# EAGLE board kapacz_drecyciel (EAGLE 6.6.0)
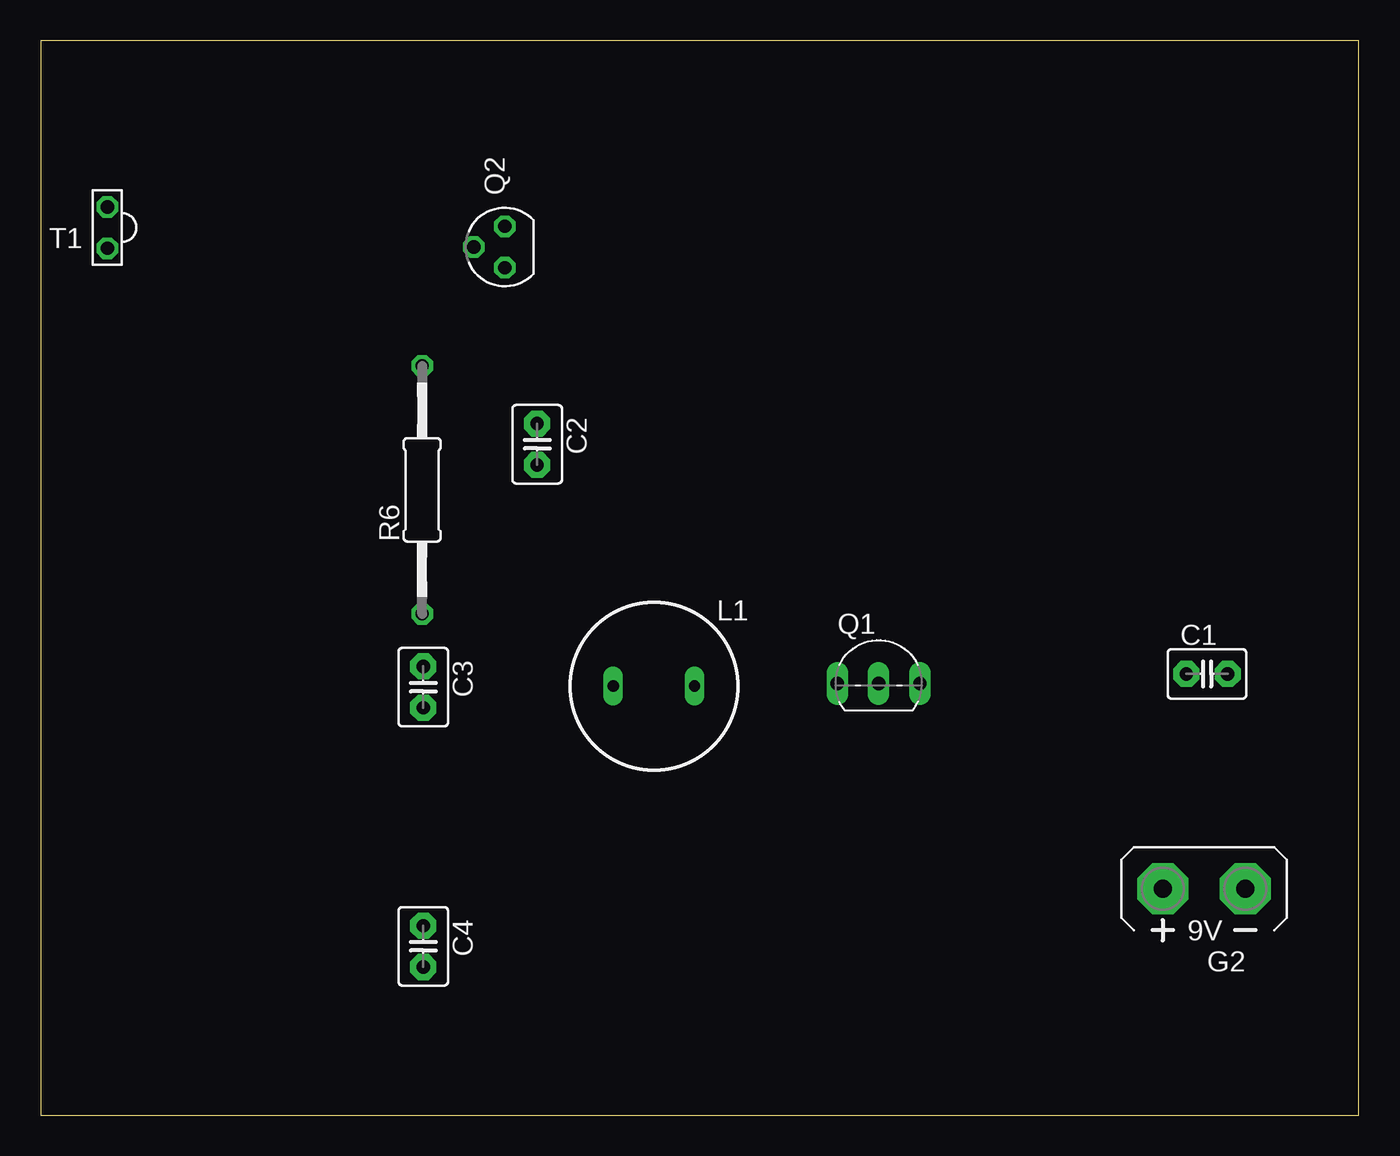
[diagram p0: board, top side]
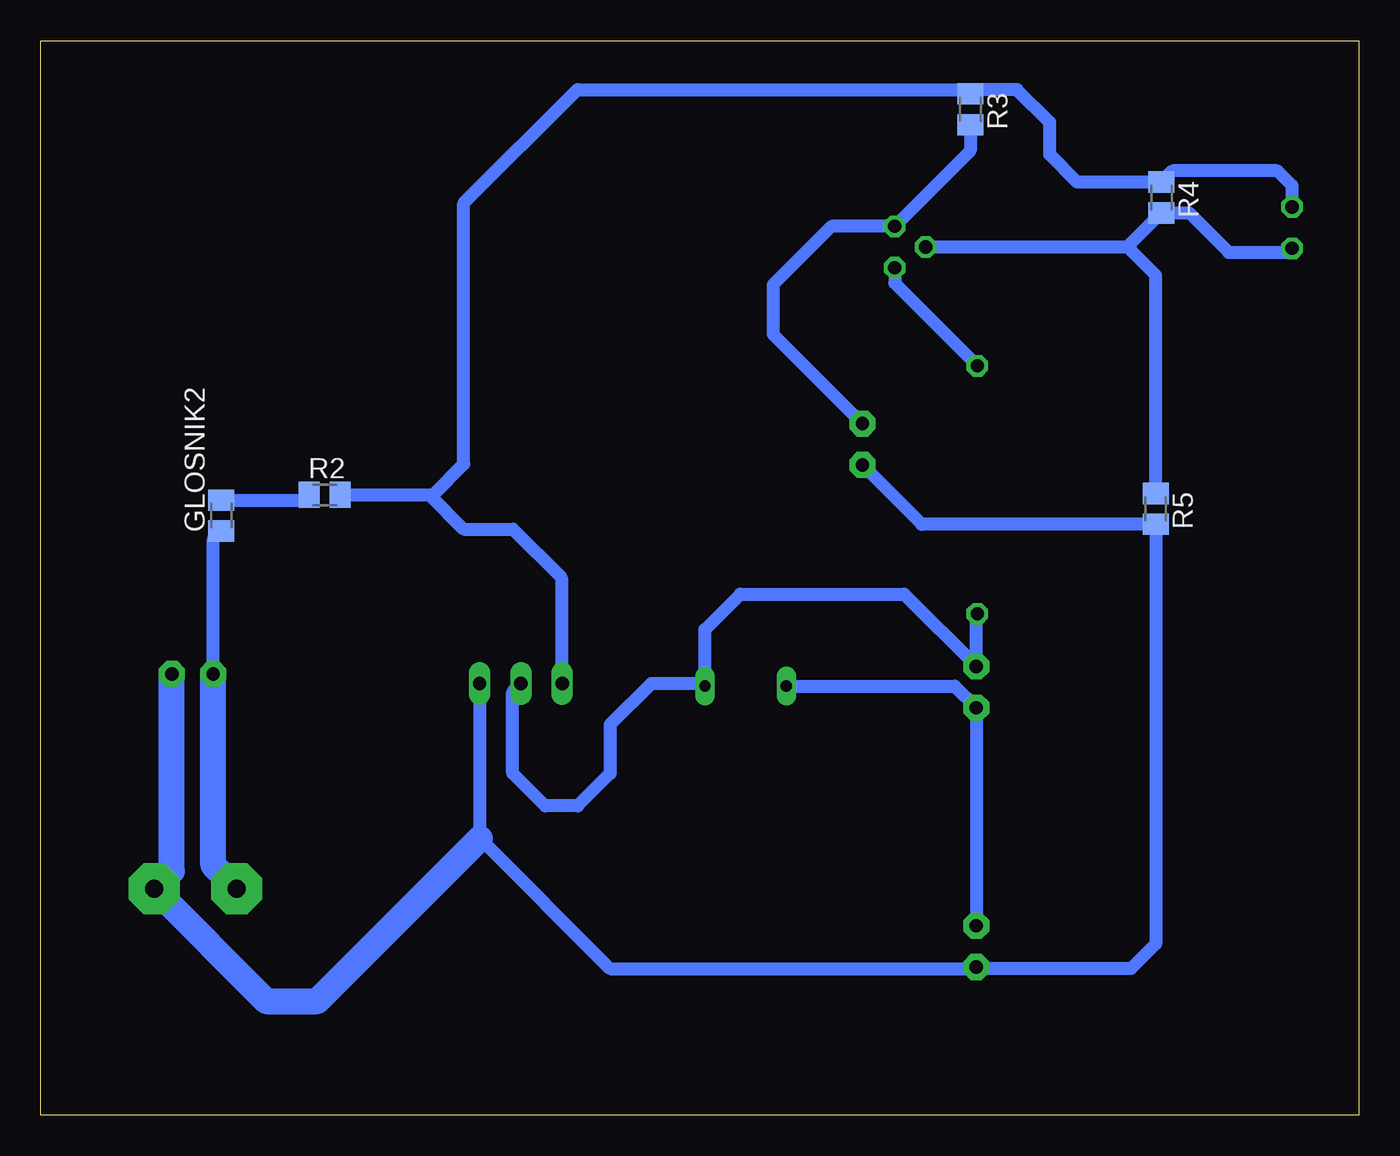
[diagram p1: board, bottom side, seen from below]

Size 81 x 66 mm. Coordinates in mm from the lower left corner, seen from the top.
Outline: 0,0 81,0 81,66 0,66 0,0
Copper layers (1*16): Top 0.035mm / dielectric 1.5mm / Bottom 0.035mm
Design rules "Lab": minimum track width 0.4mm, minimum drill 0.6mm, track to track 0.5mm, track to pad 0.5mm, pad to pad 0.5mm, via to via 0.5mm, smd to smd 0.1mm, copper to edge 2mm, drill to drill 0.2mm, minimum pad ring 10mil, minimum via ring 8mil, stop-mask expansion 4mil, vias tented up to drill 0mil, thermal gap 10mil

## Footprints (pad centres in the part's own frame; a part is rotated, then mirrored left to right if it is on the bottom)
C2.5-3 = drill 0.813 pad 1.6 octagon: 1 -1.27,0; 2 1.27,0
AB9V = drill 1.118 pad 3.15 octagon: + 0,2.54; - 0,-2.54
M0805 = smd 1.3 x 1.6: 1 -0.95,0; 2 0.95,0
BS11 = drill 0.7 long: 1 -2.5,0; 2 2.5,0
TO92-EBC = drill 0.813 long: B 0,-1.27; C -2.54,-1.27; E 2.54,-1.27
SOT54A = drill 0.813 octagon: B 0,1.905; C -1.27,0; E 1.27,0
0207/15 = drill 0.813 octagon: 1 -7.62,0; 2 7.62,0
LPT80A = drill 0.813 octagon: C 0,-1.27; E 0,1.27

## Placement (x,y rotation side)
C1  100u  [C2.5-3]  71.67,27.1 0 top
C2  10u  [C2.5-3]  30.51,41.21 270 top
C3  1u  [C2.5-3]  23.51,26.29 270 top
C4  33u  [C2.5-3]  23.51,10.37 270 top
G2  AB9V  [AB9V]  71.49,13.9 90 top
GLOSNIK2  8  [M0805]  69.9,36.83 90 bottom
L1  10mH  [BS11]  37.68,26.35 0 top
Q1  BC548  [TO92-EBC]  51.49,27.78 0 top
Q2  BC557  [SOT54A]  28.52,53.33 90 top
R2  100  [M0805]  63.55,38.1 0 bottom
R3  470k  [M0805]  23.87,61.79 270 bottom
R4  1M  [M0805]  12.13,56.37 270 bottom
R5  1M  [M0805]  12.48,37.24 270 bottom
R6  3k  [0207/15]  23.44,38.41 90 top
T1  LPT80A  [LPT80A]  4.1,54.52 180 top

## Library data of the parts
C1-C4 = capacitor-wima
G2 = battery
GLOSNIK2 R2-R5 = resistor
L1 = inductor-neosid; OC_FARNELL: unknown; OC_NEWARK: unknown
Q1 = transistor-npn
Q2 = transistor-small-signal
R6 = rcl
T1 = opto-trans-siemens; OC_FARNELL: unknown; OC_NEWARK: unknown

## Nets
GND: C1.2 C2.2 C4.2 G2.- Q1.E R5.2
N$2: C1.1 G2.+ GLOSNIK2.1
N$3: Q2.C R6.2
N$4: C3.1 L1.2 Q1.B R6.1
N$5: C3.2 C4.1 L1.1
N$7: C2.1 Q2.E R3.2
N$8: GLOSNIK2.2 R2.1
N$9: Q2.B R4.2 R5.1 T1.E
N$10: Q1.C R2.2 R3.1 R4.1 T1.C

## Tracks (layer width: path | path; a pad name or v marks a point on that pad's centre or on a via)
GND
  Bottom 0.8: C2.2 26.86,36.29 R5.2 12.48,10.52 14,9 23.41,9 C4.2 23.61,9 46,9 54,17 54.03,17.03 Q1.E
  Bottom 1.6: 54,17 64,7 67.13,7 G2.- 72.94,14.99 C1.2
N$2
  Bottom 0.8: C1.1 70.4,35.38 GLOSNIK2.1
  Bottom 1.6: G2.+ 70.4,15.35 C1.1
N$3
  Bottom 0.8: Q2.C 28.52,51.11 R6.2
N$4
  Bottom 0.8: R6.1 23.51,30.72 C3.1 27.95,32 38,32 40.18,29.82 L1.2 40.34,26.51 43.49,26.51 46,24 46,21 48,19 50,19 52,21 52,26 Q1.B
N$5
  Bottom 0.8: L1.1 24.84,26.35 C3.2 C4.1
N$7
  Bottom 0.8: R3.2 23.87,59.25 Q2.E 32.4,54.6 36,51 36,47.97 C2.1
N$8
  Bottom 0.8: GLOSNIK2.2 64.82,37.78 R2.1
N$9
  Bottom 0.8: 14.22,53.33 R4.2 10.42,55.42 8,53 4.35,53 T1.E | R5.1 12.48,51.59 13.95,53.05 14.22,53.33 | Q2.B 14.22,53.33
N$10
  Bottom 0.8: R2.2 57.1,38.1 | 57.1,38.1 55,36 52,36 49,33 49,26.56 Q1.C | 57.1,38.1 56.9,38.1 55,40 55,56 48,63 24.13,63 R3.1 23.61,63 21,63 19,61 19,59 17.32,57.32 R4.1 11.45,58 5,58 4.1,57.1 T1.C